# Altium PCB PCB1.PcbDoc
Units mm, origin at the board's own origin, x right, y up, seen from the top; angles counter-clockwise.
Board outline 33.87 x 20.4 mm, 2 copper layers (Top Layer, Bottom Layer); 14 components, 14 nets, 52 pads, 2 vias.
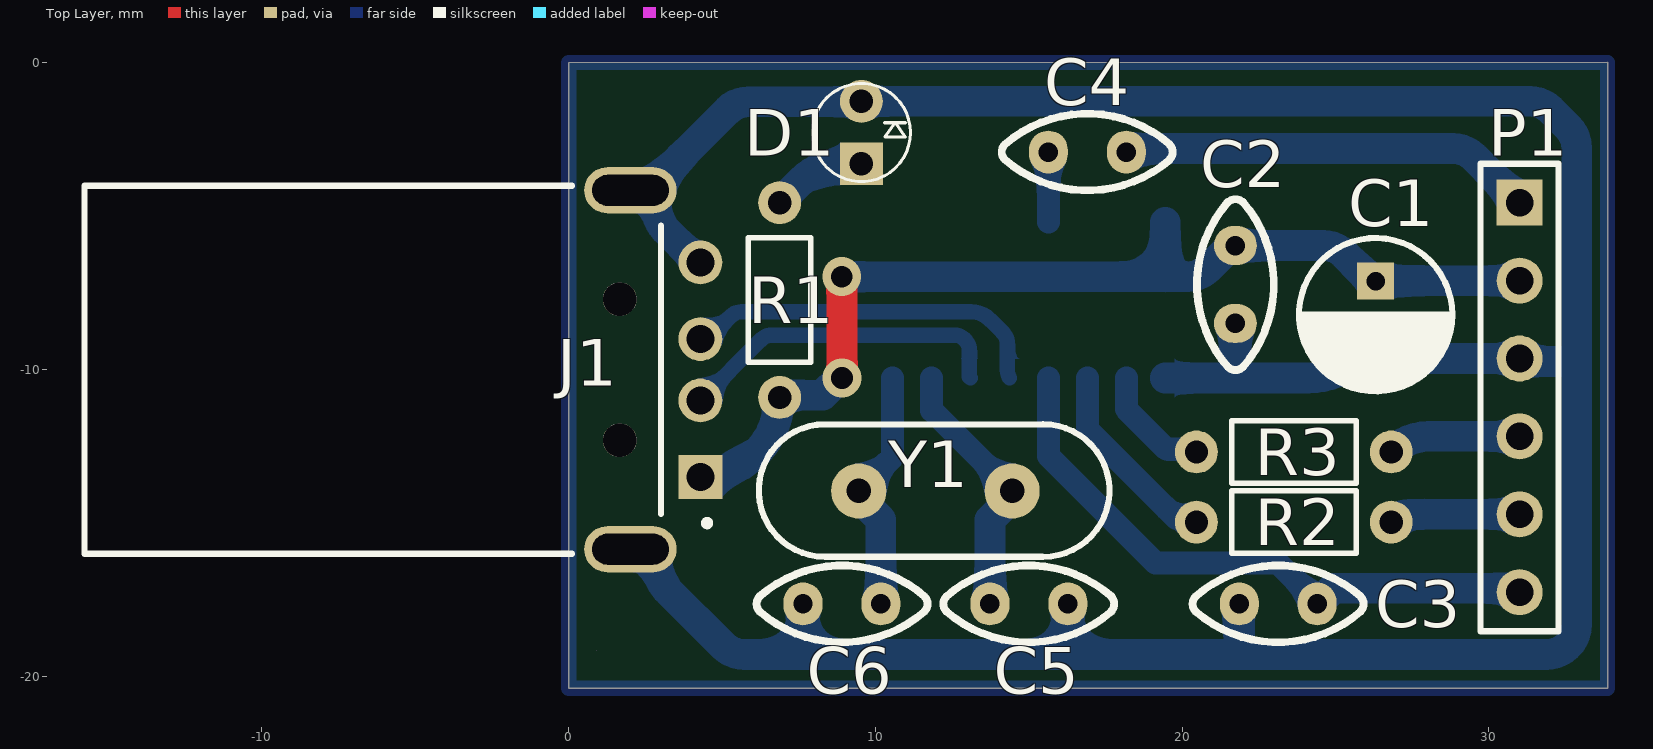
[diagram p0: Top Layer view]
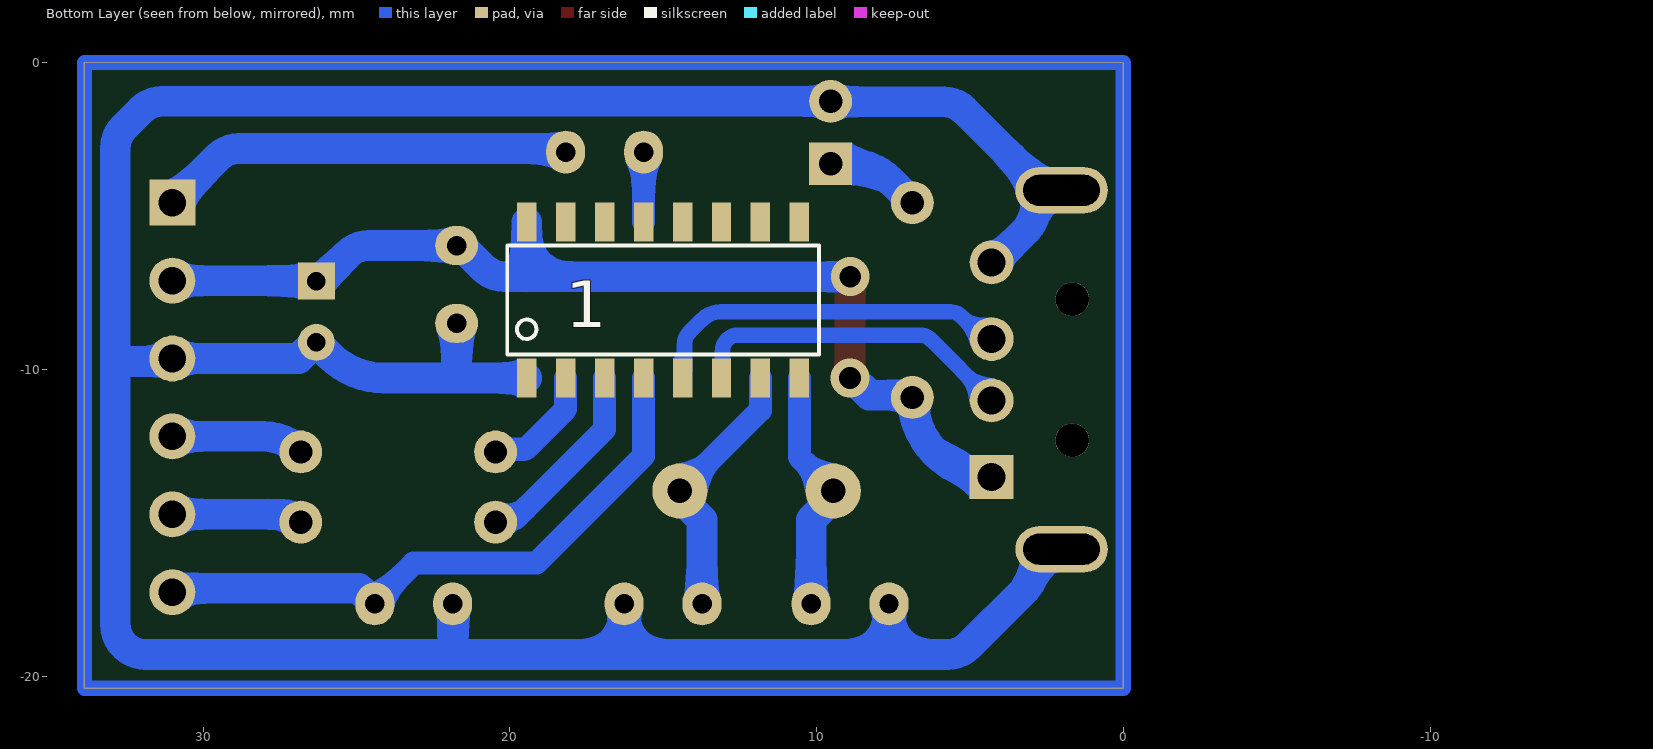
[diagram p1: Bottom Layer view, seen from below]
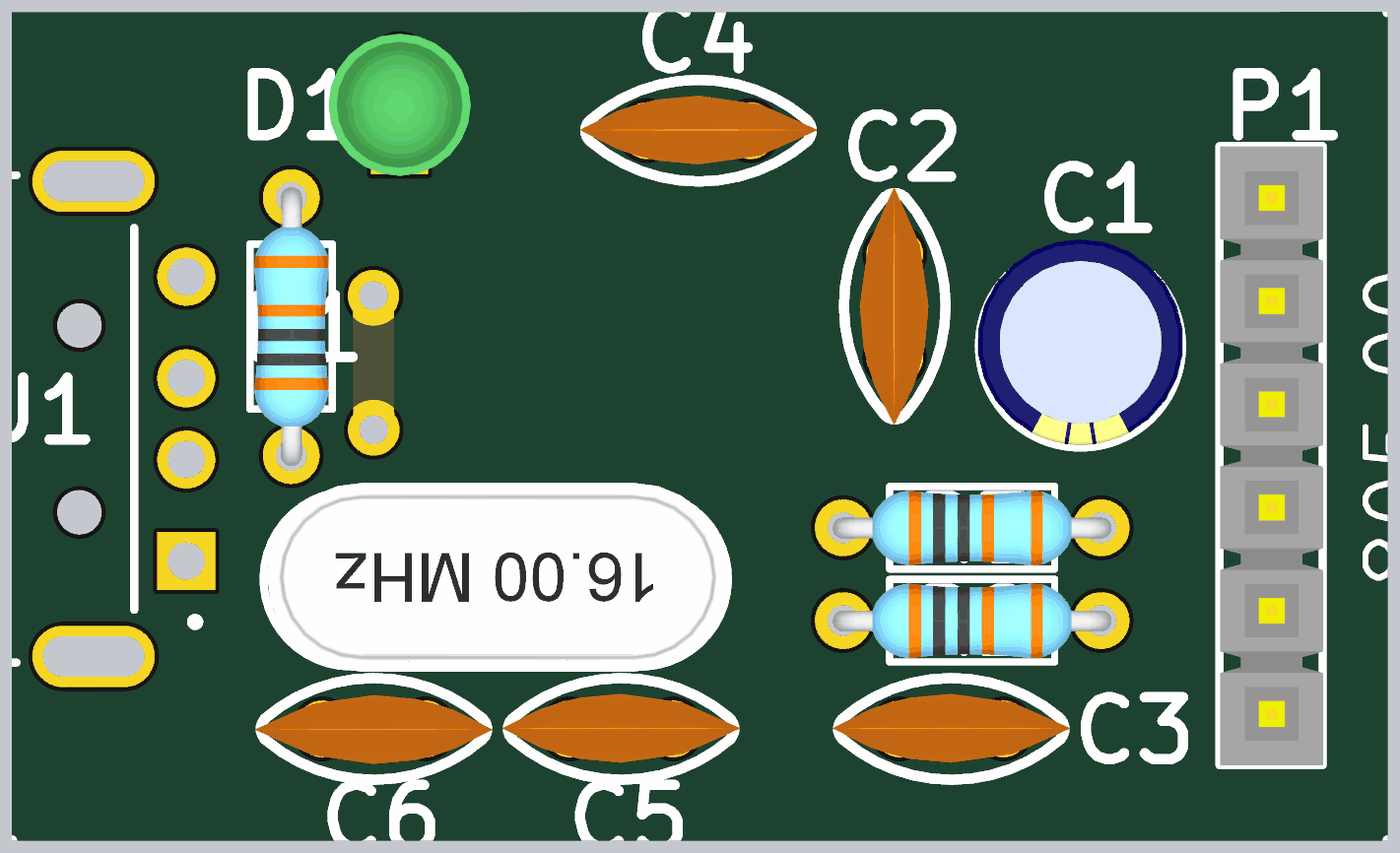
[diagram p2: 3D render of the assembled board from above, using the file's embedded part models]

## Layer stack, top to bottom
Top Solder: solder mask 0.0102, Solder Resist, Dk 3.5
Top Layer: signal copper 0.0356
Dielectric 1: dielectric 0.32, FR-4, Dk 4.8
Bottom Layer: signal copper 0.0356
Bottom Solder: solder mask 0.0102, Solder Resist, Dk 3.5

## Board outline
0,-20.389 33.868,-20.389 33.868,0.011 0,0

## Design rules (kind name [scope] priority, off if disabled: settings)
Clearance [All] p1: gap=0.254 ignorepadtopadclearanceinfootprint=FALSE except(0: Arc-Hole Track-Hole SMDPad-Hole THPad-Hole Via-Hole Fill-Hole Poly-Hole Region-Hole Text-Hole)
PolygonConnect [All] p1: connectstyle=Relief reliefconductorwidth=0.254 reliefentries=4 polygonreliefangle="90 Angle" airgapwidth=0.254
RoutingVias [All] p1: holewidth=0.711 width=1.27 viastyle="Through Hole" minholewidth=0.711 minwidth=1.27 maxholewidth=0.711 maxwidth=1.27
SolderMaskExpansion [All] p1: expansion=0.102 istentingtop=FALSE
Width [All] p1: maxlimit=1 minlimit=0.5 preferedwidth=0.75
30 further rules are at their usual default settings.

## Classes and differential pairs
component class Sheet1: C1 C2 C3 C4 C5 C6 D1 P1 R1 R2 R3 Y1

## Components (designator, comment, footprint, x,y, rotation, side; value= is the part's Value field where it differs from the comment)
1 "CH340" SOIC16 15.639,-7.736 r90 bottom
C1 "1uF" "Cap electrolitic radial 5x12-2" 26.307,-8.117 r270 top
C2 "47nF" Cap-100nF 21.735,-7.228 r270 top
C3 "100nF" Cap-100nF 23.132,-17.642 r180 top
C4 "10nF" Cap-100nF 16.909,-2.91 r180 top
C5 "22pF" Cap-100nF 15.004,-17.642 r180 top
C6 "22pF" Cap-100nF 8.908,-17.642 r0 top
D1 "LED3MM" LED3mm_GRN 9.543,-2.275 r90 top
J1 "USB-AM-S-X-X-TH" SAMTEC_USB-AM-S-X-X-TH 2.012,-10.008 r270 top
P1 "Header 6" HDR1X6 30.999,-4.561 r270 top
R1 "1K" RES-(1/4) 6.876,-7.736 r90 top
R2 "1K" RES-(1/4) 23.64,-14.975 r0 top
R3 "1K" RES-(1/4) 23.64,-12.689 r0 top
Y1 "12 MHz" "XTAL 16MHZ" 11.956,-13.959 r180 top

## Footprints (in the part's own frame and the unit in brackets; to place one, negate y for a bottom-side part, rotate by r counter-clockwise, add the part's x,y. Pads: shape width x height; smd on the part's side, far side on the other; paste and mask are expansions set on the pad)
"Cap electrolitic radial 5x12-2" [mm] "Cap electrolitic radial 5x12-2-Design:Abbas Basereh"
  rect 1.2x1.2 hole 0.6: 1(-1,0)
  round 1.2 hole 0.6: 2(1,0)
  silkscreen extent -2.4,-2.5 2.6,2.5, body extent -2.54,-2.54 2.54,2.54, height 12.2
Cap-100nF [mil] "Bipolar Capacitor-Design:Ali Hafizi"
  oval 50x55 hole 25: 1(-50,0) 2(50,0)
  silkscreen extent -110,-49 110,49, body extent -115,-34 115,33, height 272
HDR1X6 [mm] "Connector; Header; 6 Position"
  rect 1.5x1.5 hole 0.9: 1(0,0)
  round 1.5 hole 0.9: 2(2.54,0) 3(5.08,0) 4(7.62,0) 5(10.16,0) 6(12.7,0)
  silkscreen extent -1.27,-1.27 13.97,1.27, body extent -1.26,-1.25 13.98,1.29, height 8.38
LED3mm_GRN [mil]
  rect 55x55 hole 30: 1(-40,0)
  round 55 hole 30: 2(40,0)
  silkscreen extent -63,-63 63,63, body extent -69,-69 69,69, height 154
RES-(1/4) [mil]
  round 55 hole 30: 1(-125,0) 2(125,0)
  silkscreen extent -80,-40 80,40, body extent -135,-36 135,36, height 115
SAMTEC_USB-AM-S-X-X-TH [mm]
  rect 1.428x1.428 hole 0.92: 01(3.5,2.28)
  round 1.428 hole 0.92: 02(1,2.28) 03(-1,2.28) 04(-3.5,2.28)
  oval 1.508x3.016 hole 1 slot 2.5 at 90 deg: S1(-5.85,0) S2(5.85,0)
  round 1.1 hole 1.1 unplated: ""(-2.3,-0.35) ""(2.3,-0.35)
  silkscreen extent -6,-17.8 6,2.6
SOIC16 [mm]
  rect 1.27x0.635 smd: 1(-2.54,3.81) 2(-2.54,2.54) 3(-2.54,1.27) 4(-2.54,0) 5(-2.54,-1.27) 6(-2.54,-2.54) 7(-2.54,-3.81) 8(-2.54,-5.08) 9(2.54,-5.08) 10(2.54,-3.81) 11(2.54,-2.54) 12(2.54,-1.27) 13(2.54,0) 14(2.54,1.27) 15(2.54,2.54) 16(2.54,3.81)
  silkscreen extent -1.78,-5.71 1.78,4.44
"XTAL 16MHZ" [mm] "Crystal Oscillator"
  round 1.8 hole 0.8: 1(-2.5,0) 2(2.5,0)
  silkscreen extent -5.67,-2.18 5.76,2.15, body extent -5.68,-2.38 5.67,2.27, height 0.99

## Part data
1: "Circuit Breaker Magnetic 3Pole 40A 240VAC", Package=None, Availability=Unavailable, MF=Eaton, MP=CH340, Price=None, SnapEDA_Link=https://www.snapeda.com/parts/CH340/Eaton/view-part/4701946/?ref=snap
C1: library part "Cap ELECTROLITIC TOTAL SIZE", "Cap electrolitic radial", Data=16-12-2016, Designer="Abbas Basereh"
C2 C3 C4 C5 C6: library part "CAP CERAMIC TOTAL SIZE", "CAP Ceramic Total", Designer="Ali Hafizi"
D1: library part "LED 3MM", "Light Emitting Diode", Designer="Ali Hafizi"
J1: "USB-A (USB TYPE-A) USB 2.0 Plug Connector 4 Position Through Hole, Right Angle", Package=None, Availability=Unavailable, MF=Samtec, MP=USB-AM-S-F-B-TH, Price=None, SnapEDA_Link=https://www.snapeda.com/parts/USB-AM-S-F-B-TH/Samtec%20Inc./view-part/474273/?ref=snap, Toby_UK-Purchase-URL=https://snapeda.com/shop?store=Toby+UK&id=474273
P1: "Header, 6-Pin", LatestRevisionDate=17-Jul-2002, LatestRevisionNote="Re-released for DXP Platform.", Publisher="Altium Limited"
R1 R2 R3: library part "RES DIP PACKAGE", "TOTAL DIP RESISTOR PACK", Designer="Ali Hafizi"
Y1: library part XTAL, "XTAL Crystal", ComponentLink1Description=Datasheet, ComponentLink2Description=Reference, Design Date=2017-1-3, Designer="ABBAS BASEREH", Mounting Technology="Surface Mount\Through-Hole", Status=Unreleased

## Via types
v1: diameter 1.27, hole 0.711, Top Layer to Bottom Layer, 2 vias

## Nets (pads, with @x,y where several pads share a name; then routed paths per layer and width w, separated by ;. In a path a pad name is that pad's centre, name@x,y a point inside that pad or via, vN(x,y) a via of type N, cw(c..) or ccw(c..) an arc to the next point about the centre after c; other vN are vias at no path point)
3.3: 1.4 C3.1 P1.6 | length 20.2
  Bottom Layer w0.75: 1.4 15.639,-12.816 19.138,-16.314 23.138,-16.314 24.402,-17.578 C3.1
  Bottom Layer w1: C3.1 24.412,-17.642 24.92,-17.134 30.737,-17.134 30.864,-17.261 P1.6
+5: 1.16 C1.1 C2.1 J1.01 P1.2 R1.1 | length 34.3
  Top Layer w1: v1(8.901,-6.974) 8.908,-6.981 v1(8.908,-10.276)
  Bottom Layer w1: J1.01 cw(c4.525,-14.48) 4.46,-13.483 ccw(c4.292,-10.911) 6.867,-11.012 cw(c7.866,-11.051) R1.1 6.952,-10.835 8.276,-10.835 8.835,-10.276 v1(8.908,-10.276) ; v1(8.901,-6.974) 19.449,-6.974 ; 1.16 19.449,-6.974 ; P1.2 30.991,-7.109 26.315,-7.109 C1.1 cw(c26.637,-6.173) 25.93,-6.88 25.302,-6.252 ccw(c24.594,-6.958) 24.594,-5.958 21.599,-5.958 20.875,-6.681 cw(c20.168,-5.974) 20.168,-6.974 19.449,-6.974
GND: 1.1 C1.2 C2.2 C3.2 C5.1 C6.1 D1.2 J1.04 J1.S1 J1.S2 P1.3 | length 104.8
  Bottom Layer w1: J1.S1 2.573,-4.158 5.168,-1.563 cw(c5.875,-2.27) 5.877,-1.27 9.508,-1.27 cw(c9.824,-2.219) 9.541,-1.26 D1.2 31.325,-1.259 cw(c31.325,-2.259) 32.033,-1.553 32.572,-2.092 cw(c31.864,-2.798) 32.864,-2.798 32.864,-9.855 ; J1.S2@2.629,-15.858 2.863,-16.093 2.863,-16.292 ccw(c4.17,-16.292) 3.246,-17.216 5.03,-19 ccw(c5.737,-18.293) 5.737,-19.293 7.638,-19.293 ; J1.S1@2.629,-4.158 2.63,-4.159 2.641,-4.173 cw(c1.863,-4.802) 2.861,-4.737 2.865,-4.802 ccw(c3.863,-4.735) 3.156,-5.442 4.037,-6.323 ccw(c4.744,-5.616) J1.04 ; C6.1 7.638,-19.293 ; C5.1 16.274,-19.293 ; 1.1 21.735,-10.276 21.773,-10.276 ; C2.2 21.735,-10.186 ccw(c21.863,-10.186) 21.773,-10.276 ; C3.2 21.862,-17.823 21.855,-17.83 21.855,-19.046 21.608,-19.293 ; 7.638,-19.293 16.274,-19.293 ; 16.274,-19.293 21.608,-19.293 ; 21.608,-19.293 31.864,-19.293 ccw(c31.864,-18.293) 32.864,-18.293 32.864,-9.855 ; 21.773,-10.276 24.096,-10.276 ccw(c24.096,-7.736) 25.892,-9.532 C1.2 26.361,-9.117 26.885,-9.641 P1.3 31.095,-9.737 32.746,-9.737 32.864,-9.855
Net1_2: 1.2 R3.1 | length 3.9
  Bottom Layer w0.75: 1.2 18.179,-11.292 19.481,-12.594 20.37,-12.594 R3.1
Net1_3: 1.3 R2.1 | length 6.5
  Bottom Layer w0.75: 1.3 16.909,-11.95 19.81,-14.851 20.341,-14.851 R2.1
Net1_5: 1.5 J1.03 | length 12
  Bottom Layer w0.5: J1.03 4.543,-9.008 5.288,-8.263 cw(c5.641,-8.617) 5.641,-8.117 13.109,-8.117 13.112,-8.117 cw(c13.112,-8.989) 13.731,-8.375 cw(c13.379,-8.73) 13.733,-8.377 14.154,-8.798 cw(c13.802,-9.153) 14.302,-9.153 14.302,-10.025 ccw(c14.802,-10.025) 1.5
Net1_6: 1.6 J1.02 | length 10.8
  Bottom Layer w0.5: J1.02 6.275,-9.025 cw(c6.628,-9.379) 6.628,-8.879 12.563,-8.879 cw(c12.563,-9.379) 13.063,-9.379 13.063,-10.24 1.6
Net1_7: 1.7 C5.2 Y1.1 | length 8.8
  Bottom Layer w0.75: 1.7 11.829,-11.332 Y1.1
  Bottom Layer w1: C5.2 13.734,-14.897 14.456,-14.175 Y1.1
Net1_8: 1.8 C6.2 Y1.2 | length 8.1
  Bottom Layer w0.75: Y1.2 10.559,-12.856 1.8
  Bottom Layer w1: Y1.2 9.456,-14.175 10.178,-14.897 C6.2
Net1_13: 1.13 C4.2 | length 2.3
  Bottom Layer w0.75: 1.13 C4.2
NetC4_1: C4.1 P1.1 | length 13.5
  Bottom Layer w1: C4.1 cw(c18.647,-3.794) 18.648,-2.794 28.818,-2.794 cw(c28.818,-3.794) 29.525,-3.087 P1.1
NetD1_1: D1.1 R1.2 | length 3.1
  Bottom Layer w1: R1.2 cw(c7.65,-5.194) 6.943,-4.487 7.567,-3.863 cw(c8.948,-5.245) 8.948,-3.291 D1.1
NetP1_4: P1.4 R3.2 | length 4.3
  Bottom Layer w1: R3.2 cw(c28.042,-13.915) 28.042,-12.181 P1.4
NetP1_5: P1.5 R2.2 | length 4.3
  Bottom Layer w1: R2.2 cw(c27.428,-15.588) 27.428,-14.721 P1.5
pads on no net: 1.9 1.10 1.11 1.12 1.14 1.15 J1.
copper on no net: | length 108.5
  Bottom Layer w0.5: 0,-19.282 0.011,-19.293 ; 0.011,0.011 0,0 ; 33.868,-20.389 0,-20.389 0,0 ; 33.868,-20.316 33.868,-0.016 ; 33.868,0.011 0,0

## Polygon pours and split planes (outlines as drawn)
no net on Bottom Layer "NONET_L-01_P-001" (solid, pour order 5): 0.519,-18.404
no net on Bottom Layer "NONET_L-01_P-001" (solid, pour order 4): 0.9,-19.293
no net on Bottom Layer "NONET_L02_P001" (solid, pour order 1): -2.402,-18.023
no net on Mechanical 15 "NONET_L-01_P-001" (solid): 2.043,-19.547
no net on Mechanical 15 "NONET_L-01_P-001" (solid): 2.424,-19.166
no net on Mechanical 15 "NONET_L-01_P-001" (solid): 0.265,-19.42

## Keep-outs
Top Layer:
  region: 0.9,-19.166

## Other copper
Bottom Layer:
  pour cut-out: 0.138,-19.674
  pour cut-out: 0.392,-19.166
  pour cut-out: 0.392,-19.166

## Dimensions
33.868,-20.389 to 0,-20.389 on Top Overlay
33.868,0.011 to 34.301,-20.436 on Top Overlay